# EAGLE board hw2final (EAGLE 9.3.0)
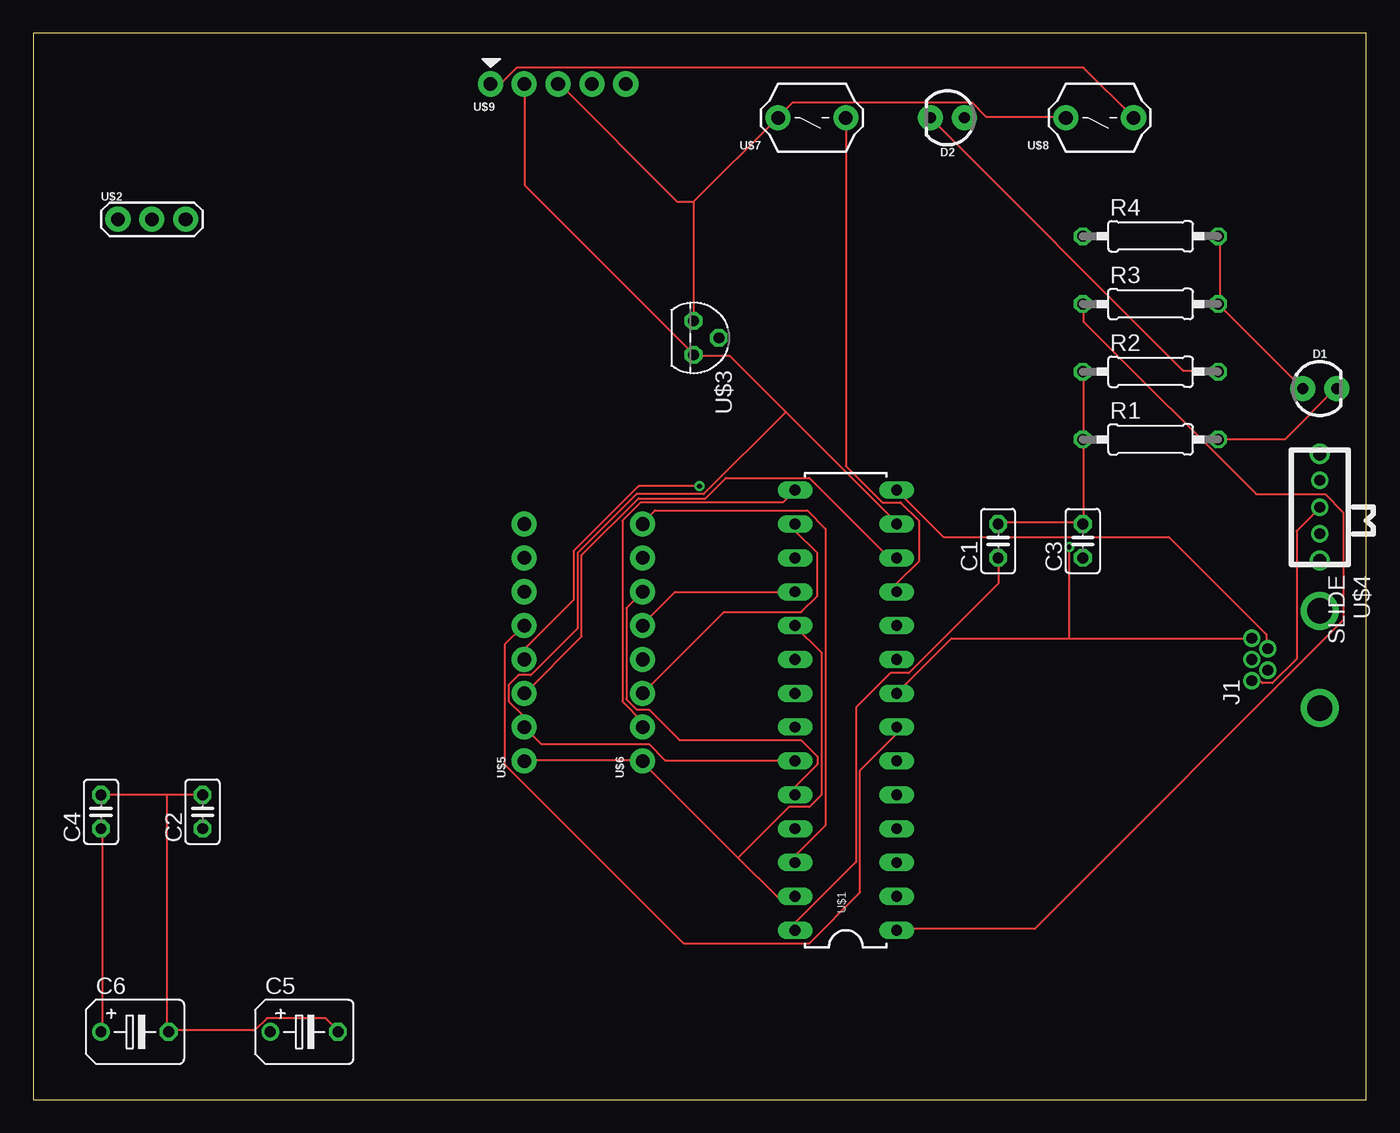
[diagram p0: board, top side]
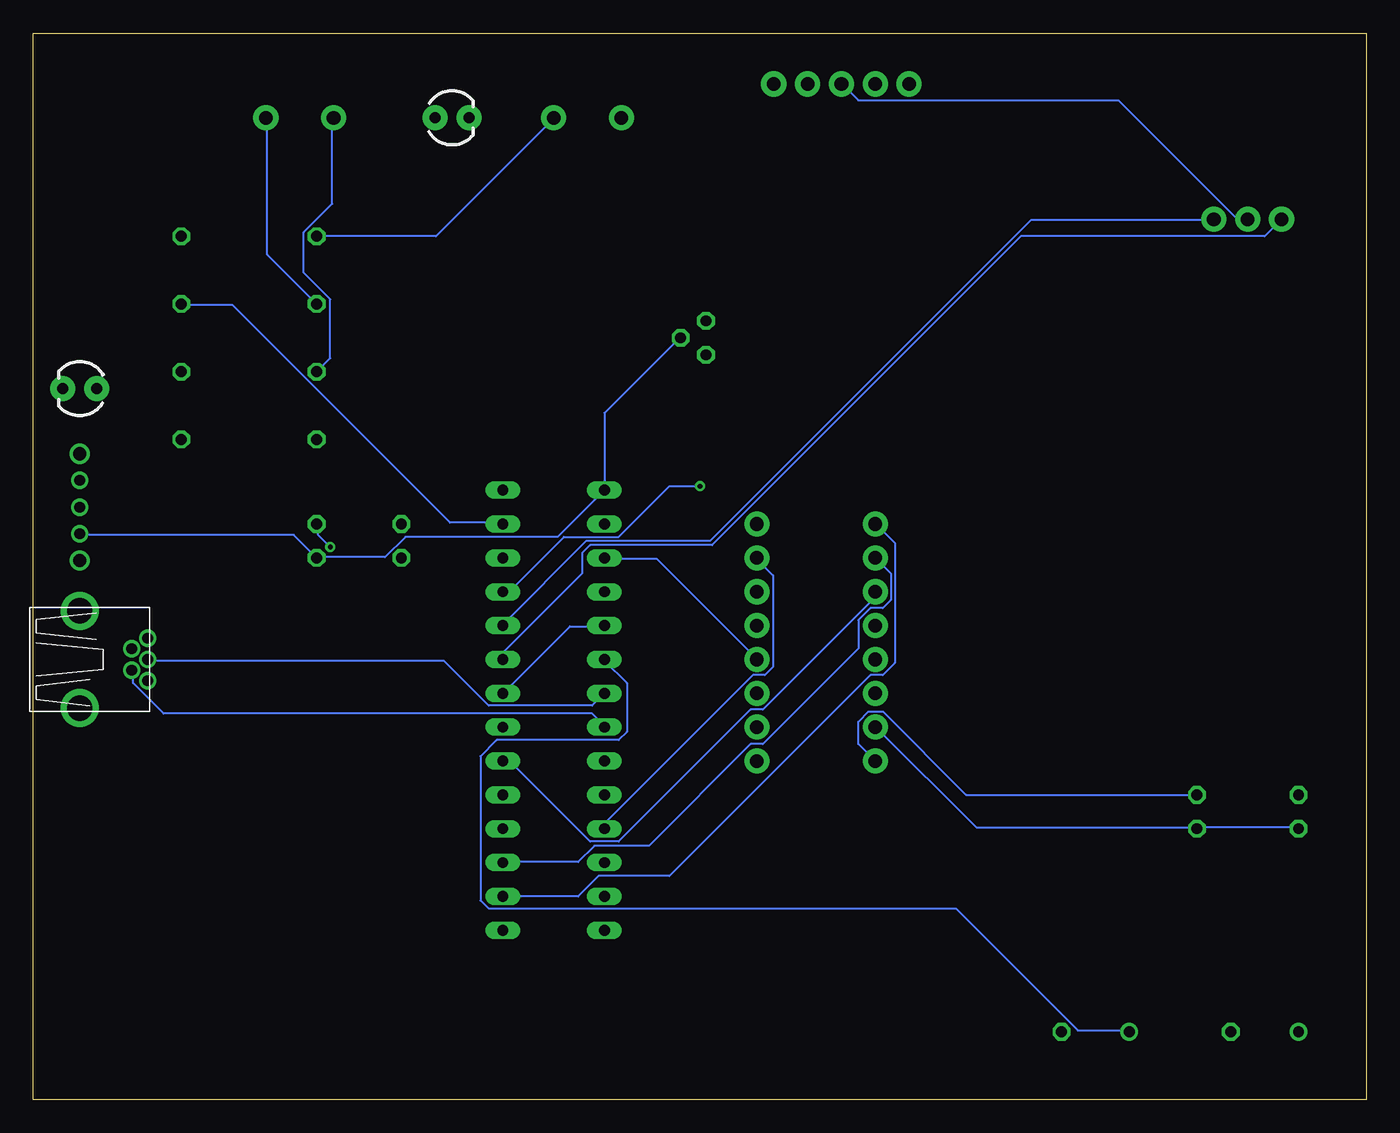
[diagram p1: board, bottom side, seen from below]

Size 100 x 80 mm. Coordinates in mm from the lower left corner, seen from the top.
Outline: 0,0 100,0 100,80 0,80 0,0
Copper layers (1*16): Top 0.035mm / dielectric 1.5mm / Bottom 0.035mm
Design rules "default": minimum track width 6mil, minimum drill 0.35mm, track to track 6mil, track to pad 6mil, pad to pad 6mil, via to via 6mil, smd to smd 6mil, copper to edge 40mil, drill to drill 6mil, minimum pad ring 10mil, minimum via ring 8mil, stop-mask expansion 4mil, vias tented up to drill 0mil, thermal gap 10mil

## Footprints (pad centres in the part's own frame; a part is rotated, then mirrored left to right if it is on the bottom)
C025-025X050 = drill 0.813 octagon: 1 -1.27,0; 2 1.27,0
B45181B = drill 0.813: + -2.54,0 | drill 0.813 octagon: - 2.54,0
LED_3MM = drill 0.813 pad 1.88: A -1.27,0; K 1.27,0
USB-MB-H = drill 0.8: D+ 5.1,0; D- 3.9,0.8; GND 5.1,-1.6; ID 3.9,-0.8; VBUS 5.1,1.6 | drill 1.9: P$6 0,-3.65; P$7 0,3.65
0207/10 = drill 0.813 octagon: 1 -5.08,0; 2 5.08,0
DIL28-3 = drill 0.813 long: 1 -16.51,-3.81; 2 -13.97,-3.81; 3 -11.43,-3.81; 4 -8.89,-3.81; 5 -6.35,-3.81; 6 -3.81,-3.81; 7 -1.27,-3.81; 8 1.27,-3.81; 9 3.81,-3.81; 10 6.35,-3.81; 11 8.89,-3.81; 12 11.43,-3.81; 13 13.97,-3.81; 14 16.51,-3.81; 15 16.51,3.81; 16 13.97,3.81; 17 11.43,3.81; 18 8.89,3.81; 19 6.35,3.81; 20 3.81,3.81; 21 1.27,3.81; 22 -1.27,3.81; 23 -3.81,3.81; 24 -6.35,3.81; 25 -8.89,3.81; 26 -11.43,3.81; 27 -13.97,3.81; 28 -16.51,3.81
OSC = drill 1.016 pad 1.88: 1 -2.54,0; 2 0,0; 3 2.54,0
TO92 = drill 0.813 octagon: 1 -1.27,0; 2 0,1.905; 3 1.27,0
SLIDE = drill 0.8: 1 -2,0; 2 0,0; 3 2,0 | drill 1: P$1 -4,0; P$2 4,0
1X08 = drill 1.016 pad 1.88: 1 0,0; 2 2.54,0; 3 5.08,0; 4 7.62,0; 5 10.16,0; 6 12.7,0; 7 15.24,0; 8 17.78,0
PB = drill 1.016 pad 1.88: 1 -2.54,0; 2 2.54,0
1X05 = drill 1.016 pad 1.88: 1 0,0; 2 2.54,0; 3 5.08,0; 4 7.62,0; 5 10.16,0

## Placement (x,y rotation side)
C1  0.1uF  [C025-025X050]  72.39,41.91 90 top
C2  0.1uF  [C025-025X050]  12.7,21.59 90 top
C3  0.1uF  [C025-025X050]  78.74,41.91 90 top
C4  0.1uF  [C025-025X050]  5.08,21.59 90 top
C5  10uF  [B45181B]  20.32,5.08 0 top
C6  10uF  [B45181B]  7.62,5.08 0 top
D1  Red  [LED_3MM]  96.52,53.34 0 top
D2  Green  [LED_3MM]  68.58,73.66 180 top
J1  USB-MB-H  [USB-MB-H]  96.52,33.02 180 top
R1  330  [0207/10]  83.82,49.53 0 top
R2  330  [0207/10]  83.82,54.61 0 top
R3  10k  [0207/10]  83.82,59.69 0 top
R4  10k  [0207/10]  83.82,64.77 0 top
U$1  PIC32MX250F128B  [DIL28-3]  60.96,29.21 90 top
U$2  OSC  [OSC]  8.89,66.04 0 top
U$3  MCP1702  [TO92]  49.53,57.15 270 top
U$4  SLIDE  [SLIDE]  96.52,44.45 270 top
U$5  CONN_08  [1X08]  36.83,25.4 90 top
U$6  CONN_08  [1X08]  45.72,25.4 90 top
U$7  RESET  [PB]  58.42,73.66 180 top
U$8  USER  [PB]  80.01,73.66 180 top
U$9  PICKIT3  [1X05]  34.29,76.2 0 top

## Library data of the parts
C1 C2 C4-C6 = hw2; SPICEPREFIX: C
C3 = hw2; SPICEPREFIX: 0.1uF
D1 D2 = SparkFun-LED; PROD_ID: DIO-08794
J1 U$1-U$9 = hw2
R1-R4 = hw2; SPICEPREFIX: R

## Nets
+3V3: C2.1 C4.1 C6.+ D1.A R3.2 R4.2 U$1.13 U$1.23 U$3.3 U$5.2 U$9.2
+5V: C3.1 U$1.15 U$3.2 U$4.3 U$6.2
A0: U$1.2 U$5.8
A1: U$1.3 U$5.7
A4/LED: U$1.12 U$5.3
B2: U$1.6 U$5.6
B3: U$1.7 U$5.5
B4/USER: R4.1 U$1.11 U$5.4 U$7.1
B7: U$1.16 U$6.3
B8: U$1.17 U$6.4
B9: U$1.18 U$6.5
B13: U$1.24 U$6.6
B14: U$1.25 U$6.7
B15: U$1.26 U$6.8
D+: J1.D+ U$1.21
D-: J1.D- U$1.22
GND: C1.2 C2.2 C3.2 C4.2 C5.- C6.- J1.GND R1.1 R2.1 U$1.8 U$1.19 U$1.27 U$2.2 U$3.1 U$5.1 U$6.1 U$7.2 U$8.2 U$9.3
MCLR: R3.1 U$1.1 U$8.1 U$9.1
N$1: J1.VBUS U$4.2
N$2: D1.K R1.2
N$3: D2.K R2.2
N$4: U$1.9 U$2.1
N$5: U$1.10 U$2.3
N$7: C5.+ U$1.20
N$26: C1.1 U$1.28
PGC: U$9.5
PGD: U$9.4
PGEC: U$1.5
PGED: U$1.4
USBID: J1.ID U$1.14

## Tracks (layer width: path | path; a pad name or v marks a point on that pad's centre or on a via)
+3V3
  Top 0.152: C6.+ 5.18,5.18 5.18,20.27 C4.1 | U$1.23 57.15,25.45 47.4,25.45 46.18,26.67 38.1,26.67 U$5.2 36.73,28.04 36.73,28.8 35.66,29.87 35.66,31.09 36.42,31.85 37.34,31.85 40.84,35.36 40.84,41 45.26,45.41 50.29,45.41 56.39,51.51 56.39,51.66 | R4.2 89,64.77 89,59.74 R3.2 D1.A | 56.39,51.66 64.77,43.28 U$1.13 | 56.39,51.66 52.27,55.78 49.53,55.78 U$3.3 49.53,55.93 36.88,68.58 36.88,76.2 U$9.2
  Bottom 0.152: C4.1 5.18,20.42 12.65,20.42 C2.1 12.8,20.42 29.26,20.42 36.73,27.89 U$5.2 | R3.2 88.85,59.59 85.04,59.59 68.73,43.28 64.77,43.28 U$1.13
+5V
  Top 0.152: U$6.2 45.72,28.35 44.2,29.87 44.2,43.43 45.57,44.81 56.24,44.81 U$1.15
  Bottom 0.152: U$4.3 96.47,42.37 80.47,42.37 C3.1 78.64,40.69 73.61,40.69 72.08,42.22 60.66,42.22 U$1.15 57.15,51.51 51.51,57.15 U$3.2
A0
  Bottom 0.152: U$1.2 59.13,15.24 57.61,16.76 52.27,16.76 37.19,31.85 36.27,31.85 35.36,32.77 35.36,41.76 36.73,43.13 U$5.8
A1
  Bottom 0.152: U$5.7 35.66,39.47 35.66,37.49 36.27,36.88 37.19,36.88 38.1,35.97 38.1,33.83 45.26,26.67 46.18,26.67 53.8,19.05 57.91,19.05 59.13,17.83 64.77,17.83 U$1.3
A4/LED
  Top 0.152: U$1.12 64.77,40.69 64.16,40.69 58.22,46.63 51.97,46.63 50.44,45.11 45.41,45.11 41.15,40.84 41.15,34.75 36.88,30.48 U$5.3
B2
  Bottom 0.152: U$1.6 64.77,25.3 64.16,25.3 58.22,19.36 56.08,19.36 46.18,29.26 45.26,29.26 36.88,37.64 36.88,38.1 U$5.6
B3
  Top 0.152: U$1.7 64.77,27.43 62.03,24.69 62.03,15.54 58.22,11.73 48.77,11.73 35.36,25.15 35.36,34.14 36.73,35.51 U$5.5
B4/USER  (via drill 0.35)
  Top 0.152: U$1.11 64.77,38.71 66.45,40.39 66.45,43.43 65.08,44.81 63.7,44.81 60.96,47.55 U$7.1 | v49.99,46.02 45.41,46.02 40.54,41.15 40.54,37.49 36.88,33.83 36.88,33.07 U$5.4
  Bottom 0.152: R4.1 69.8,64.77 60.96,73.61 U$7.1 | v49.99,46.02 52.27,46.02 56.08,42.22 60.2,42.22 64.31,38.1 U$1.11
B7
  Top 0.152: U$1.16 57.15,42.67 58.83,41 58.83,37.8 57.61,36.58 51.82,36.58 U$6.3
B8
  Bottom 0.152: U$1.17 57.15,40.54 53.19,40.54 45.72,33.07 U$6.4
B9
  Top 0.152: U$1.18 48.16,38.1 45.72,35.66 U$6.5
B13
  Top 0.152: U$1.24 57.15,23.47 58.83,25.15 58.83,25.76 57.61,26.98 48.46,26.98 46.18,29.26 45.26,29.26 44.5,30.02 44.5,36.88 U$6.6
B14
  Bottom 0.152: U$1.25 57.15,20.73 46.02,31.85 45.11,31.85 44.5,32.46 44.5,39.32 45.72,40.54 U$6.7
B15
  Top 0.152: U$1.26 57.15,18.29 59.44,20.57 59.44,42.82 58.06,44.2 46.63,44.2 45.72,43.28 U$6.8
D+
  Bottom 0.152: U$1.21 58.06,29.57 65.84,29.57 69.19,32.92 91.29,32.92 J1.D+
D-
  Bottom 0.152: J1.D- 92.51,32.16 92.51,31.24 90.22,28.96 58.06,28.96 57.15,28.04 U$1.22
GND  (via drill 0.35)
  Top 0.152: C1.2 72.39,43.28 78.64,43.28 C3.2 78.79,43.28 78.79,49.53 | 78.79,49.53 78.79,54.56 R2.1 | 78.79,49.53 R1.1 | 49.53,67.36 U$3.1 | 49.53,67.36 55.78,73.61 U$7.2 55.93,73.76 57,74.83 70.41,74.83 71.48,73.76 77.42,73.76 U$8.2 | 49.53,67.36 48.31,67.36 39.47,76.2 U$9.3 | C2.2 10.06,22.86 | 10.06,22.86 C4.2 | C5.- 22.86,5.18 21.95,6.1 17.53,6.1 16.61,5.18 10.21,5.18 C6.- 10.06,5.18 10.06,22.86 | U$1.27 55.78,15.24 52.88,18.14 | 52.88,18.14 45.72,25.3 U$6.1 45.72,25.45 36.88,25.45 U$5.1 | 77.72,34.59 68.89,34.59 U$1.8 | 77.72,34.59 91.29,34.59 J1.GND | 52.88,18.14 56.69,21.95 58.22,21.95 59.13,22.86 59.13,33.53 57.15,35.51 U$1.19 | 77.72,34.59 v77.72,41.45
  Bottom 0.152: R2.1 77.72,55.63 77.72,60.05 79.7,62.03 79.7,65.08 77.57,67.21 77.57,73.61 U$8.2 | U$2.2 8.99,66.14 9.75,66.14 18.59,74.98 38.1,74.98 39.32,76.2 U$9.3 | U$1.8 59.74,35.51 57.15,35.51 U$1.19 | C2.2 30.02,22.86 36.27,29.11 37.34,29.11 38.1,28.35 38.1,26.67 U$5.1 | v77.72,41.45 78.64,42.37 78.64,43.13 C3.2
MCLR
  Top 0.152: U$1.1 64.77,12.8 75.13,12.8 98.3,35.97 98.3,44.04 96.93,45.41 91.75,45.41 78.79,58.37 78.79,59.59 R3.1 | U$9.1 35.05,76.2 36.27,77.42 78.79,77.42 U$8.1
  Bottom 0.152: R3.1 82.45,63.4 82.45,73.61 U$8.1
N$1
  Top 0.152: J1.VBUS 91.44,31.39 92.05,31.39 92.2,31.24 92.96,31.24 94.79,33.07 94.79,42.67 96.47,44.35 U$4.2
N$2
  Top 0.152: R1.2 93.88,49.53 97.69,53.34 D1.K
N$3
  Top 0.152: D2.K 86.26,54.71 88.85,54.71 R2.2
N$4
  Bottom 0.152: U$1.9 64.77,33.53 58.83,39.47 58.83,41 58.22,41.6 49.07,41.6 25.91,64.77 7.62,64.77 U$2.1
N$5
  Bottom 0.152: U$1.10 64.77,35.66 58.52,41.91 49.23,41.91 25.15,65.99 11.43,65.99 U$2.3
N$7
  Bottom 0.152: C5.+ 17.83,5.18 21.64,5.18 30.79,14.33 65.84,14.33 66.45,14.94 66.45,25.76 65.23,26.98 56.08,26.98 55.47,27.58 55.47,31.24 57.15,32.92 U$1.20
N$26
  Top 0.152: U$1.28 57.15,13.26 61.72,17.83 61.72,29.41 64.31,32 65.68,32 72.39,38.71 C1.1
USBID
  Top 0.152: U$1.14 68.28,42.22 85.19,42.22 92.51,34.9 92.51,33.83 J1.ID